# Altium PCB PCB_Mach_giao_tiep.PcbDoc (part 1 of 2)
Units mm, origin at the board's own origin, x right, y up, seen from the top; angles counter-clockwise.
Board outline 102.41 x 90.02 mm, 2 copper layers (Top Layer, Bottom Layer); 27 components, 181 nets, 442 pads, 75 vias.
Unrouted connection lines stored in the file: 4.
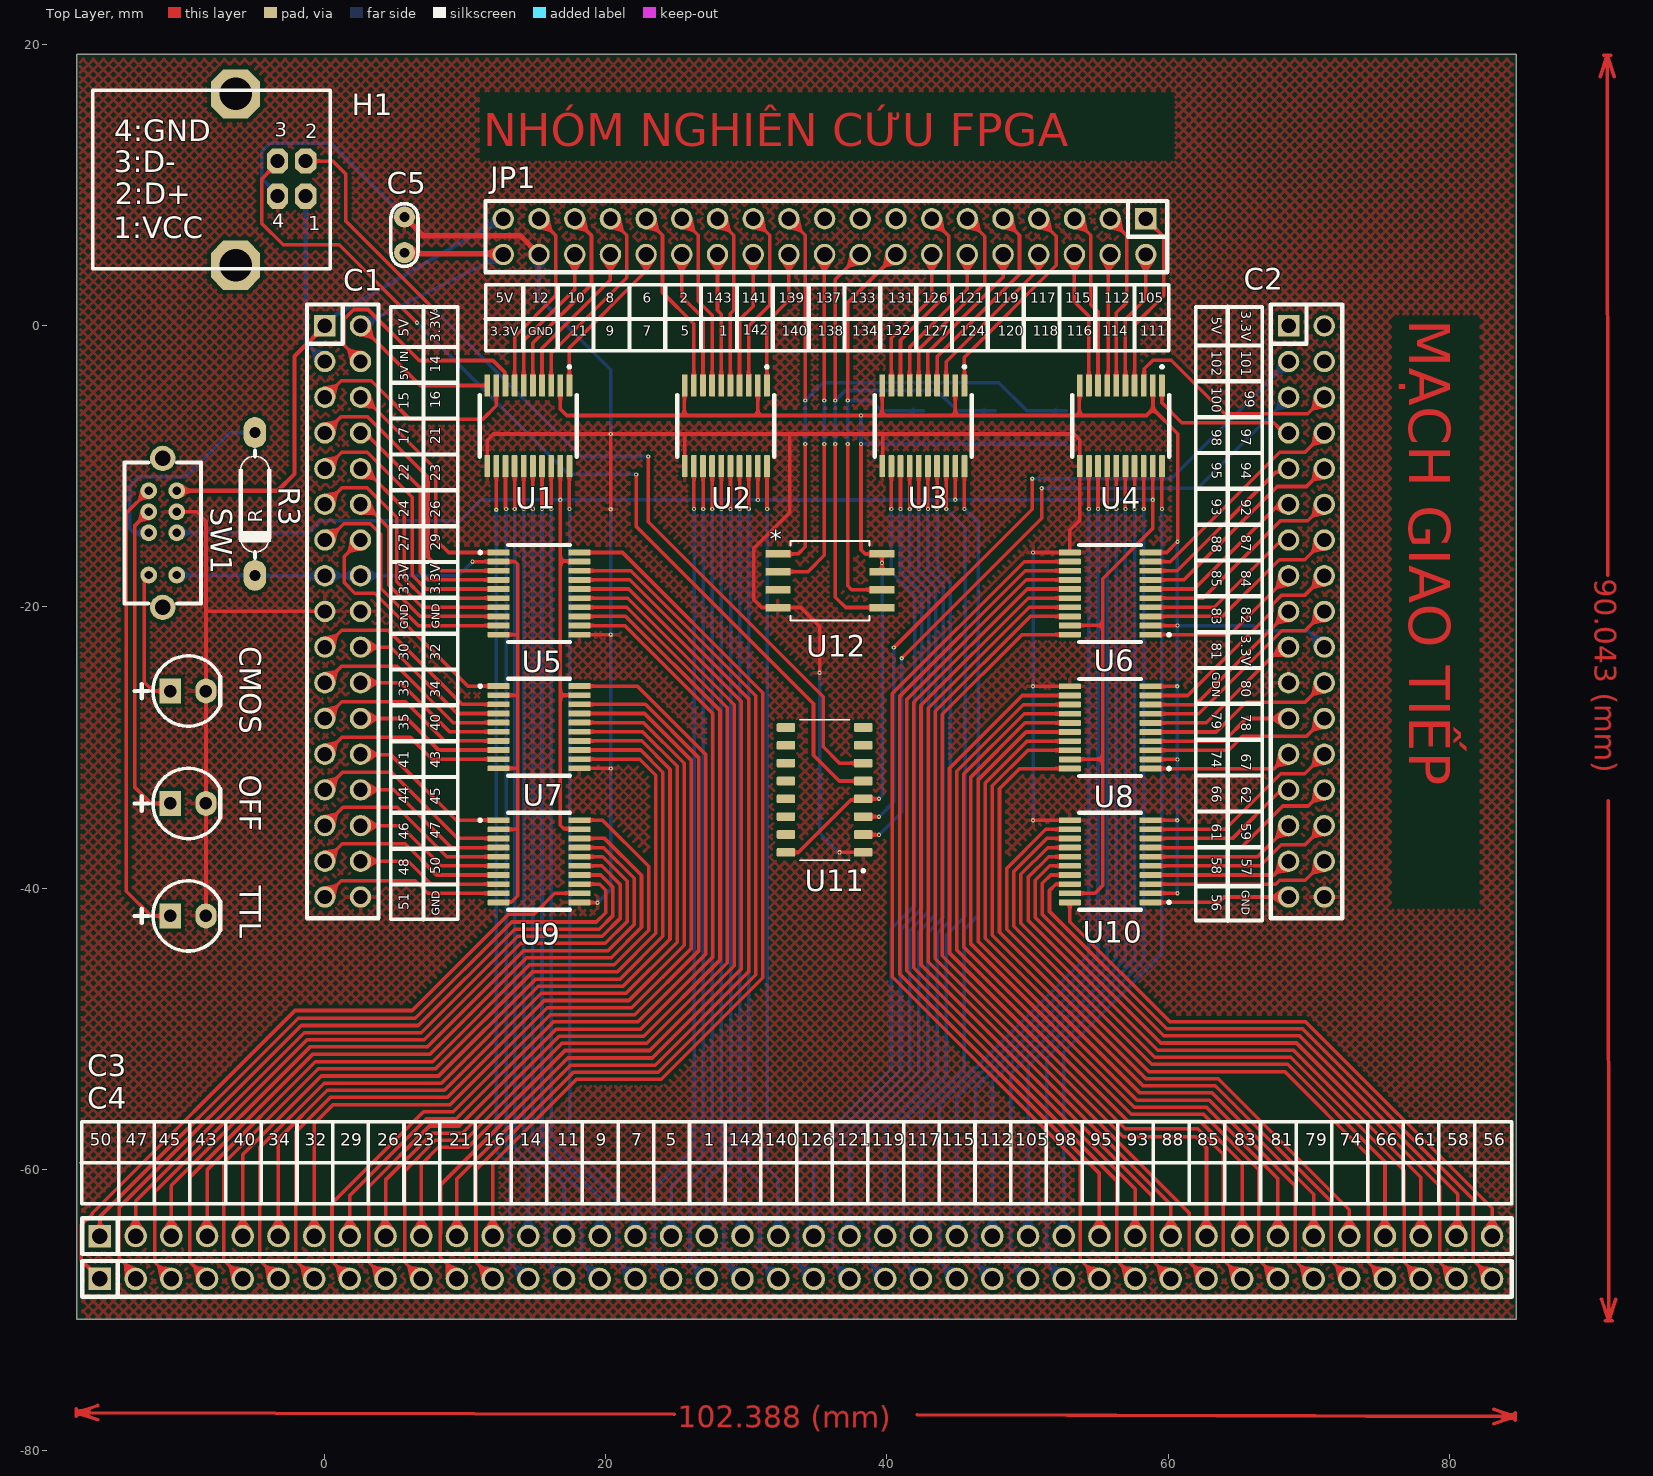
[diagram p0: Top Layer view]
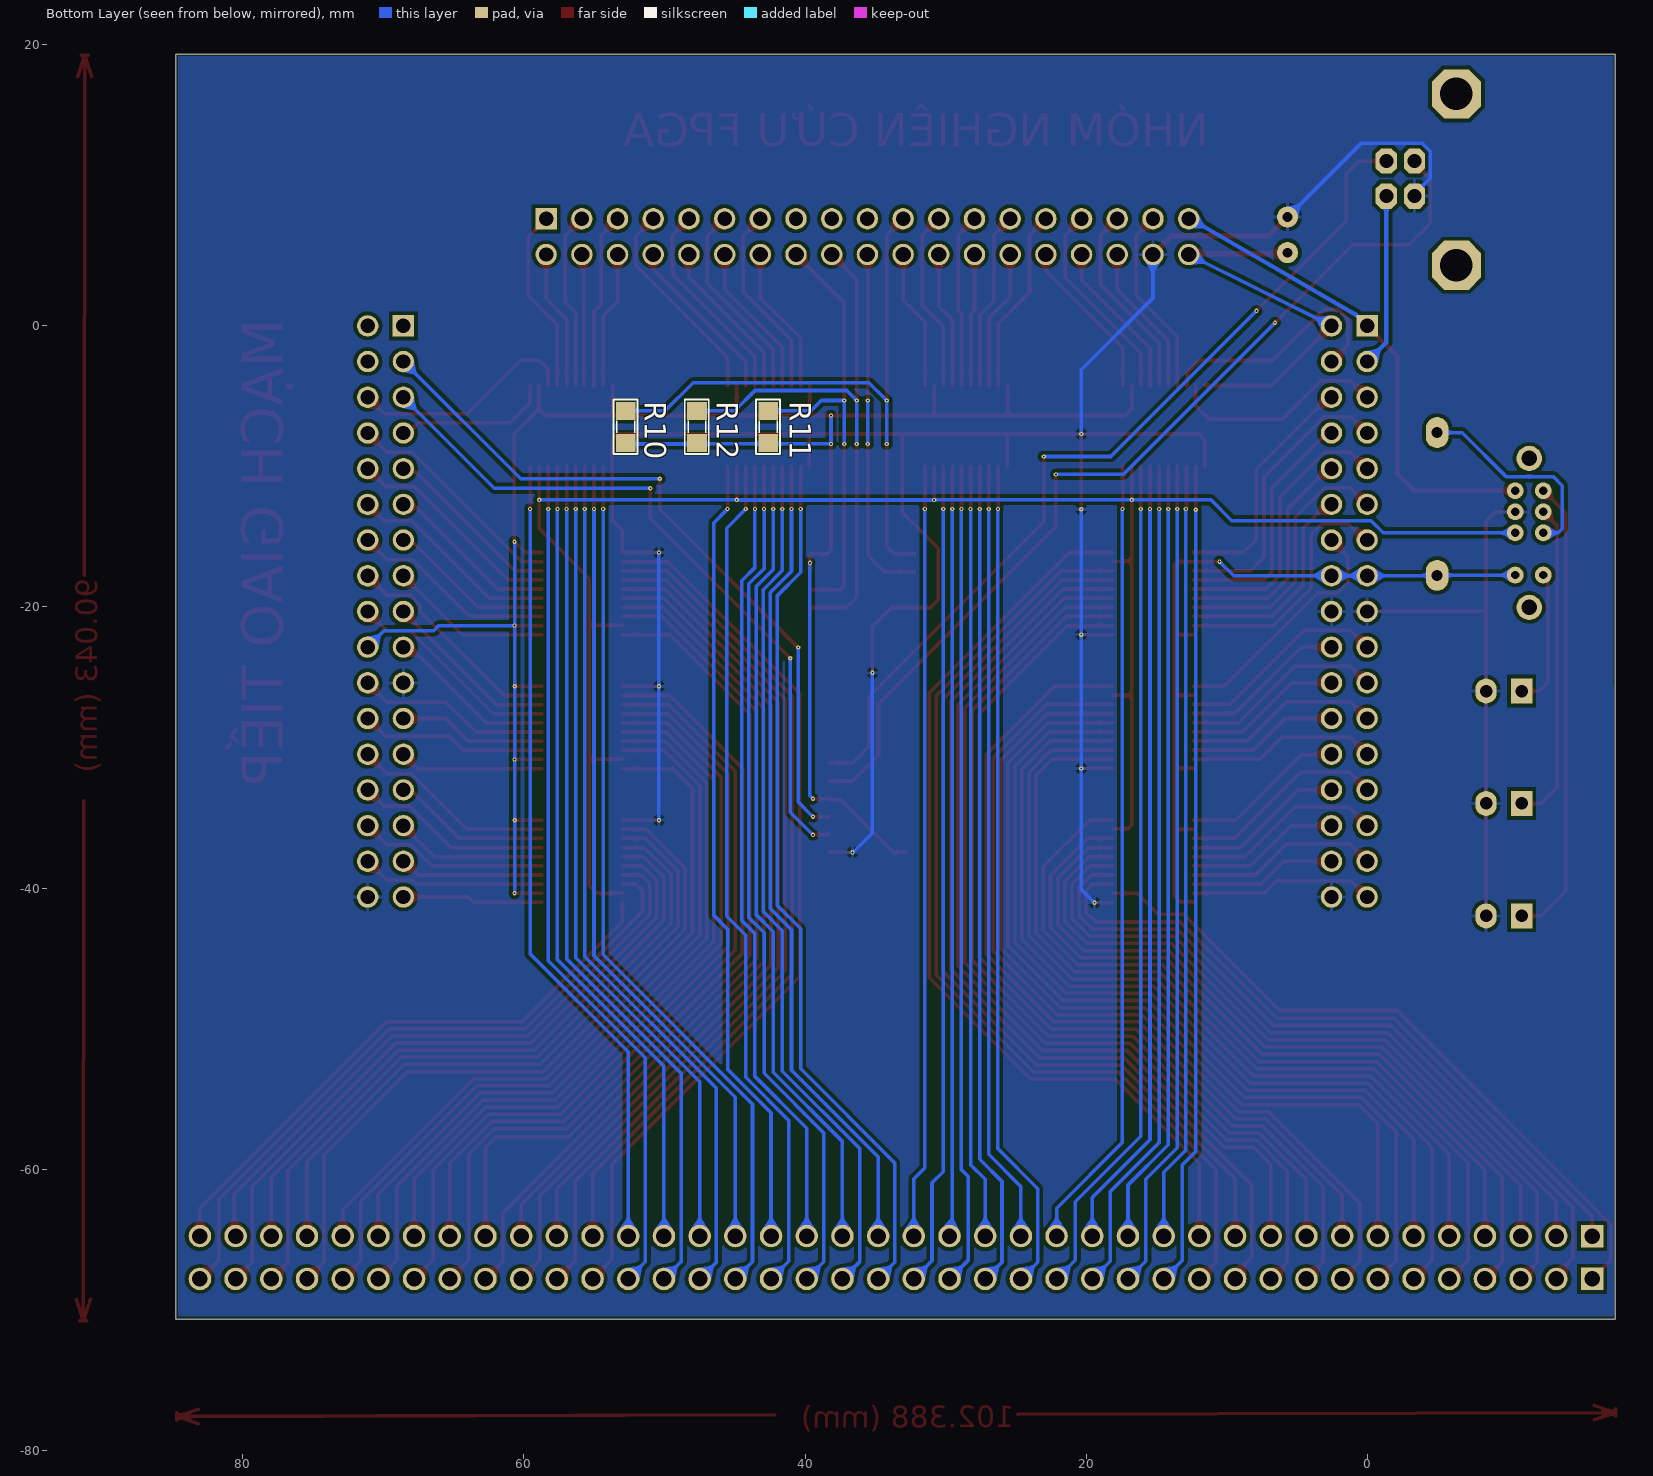
[diagram p1: Bottom Layer view, seen from below]
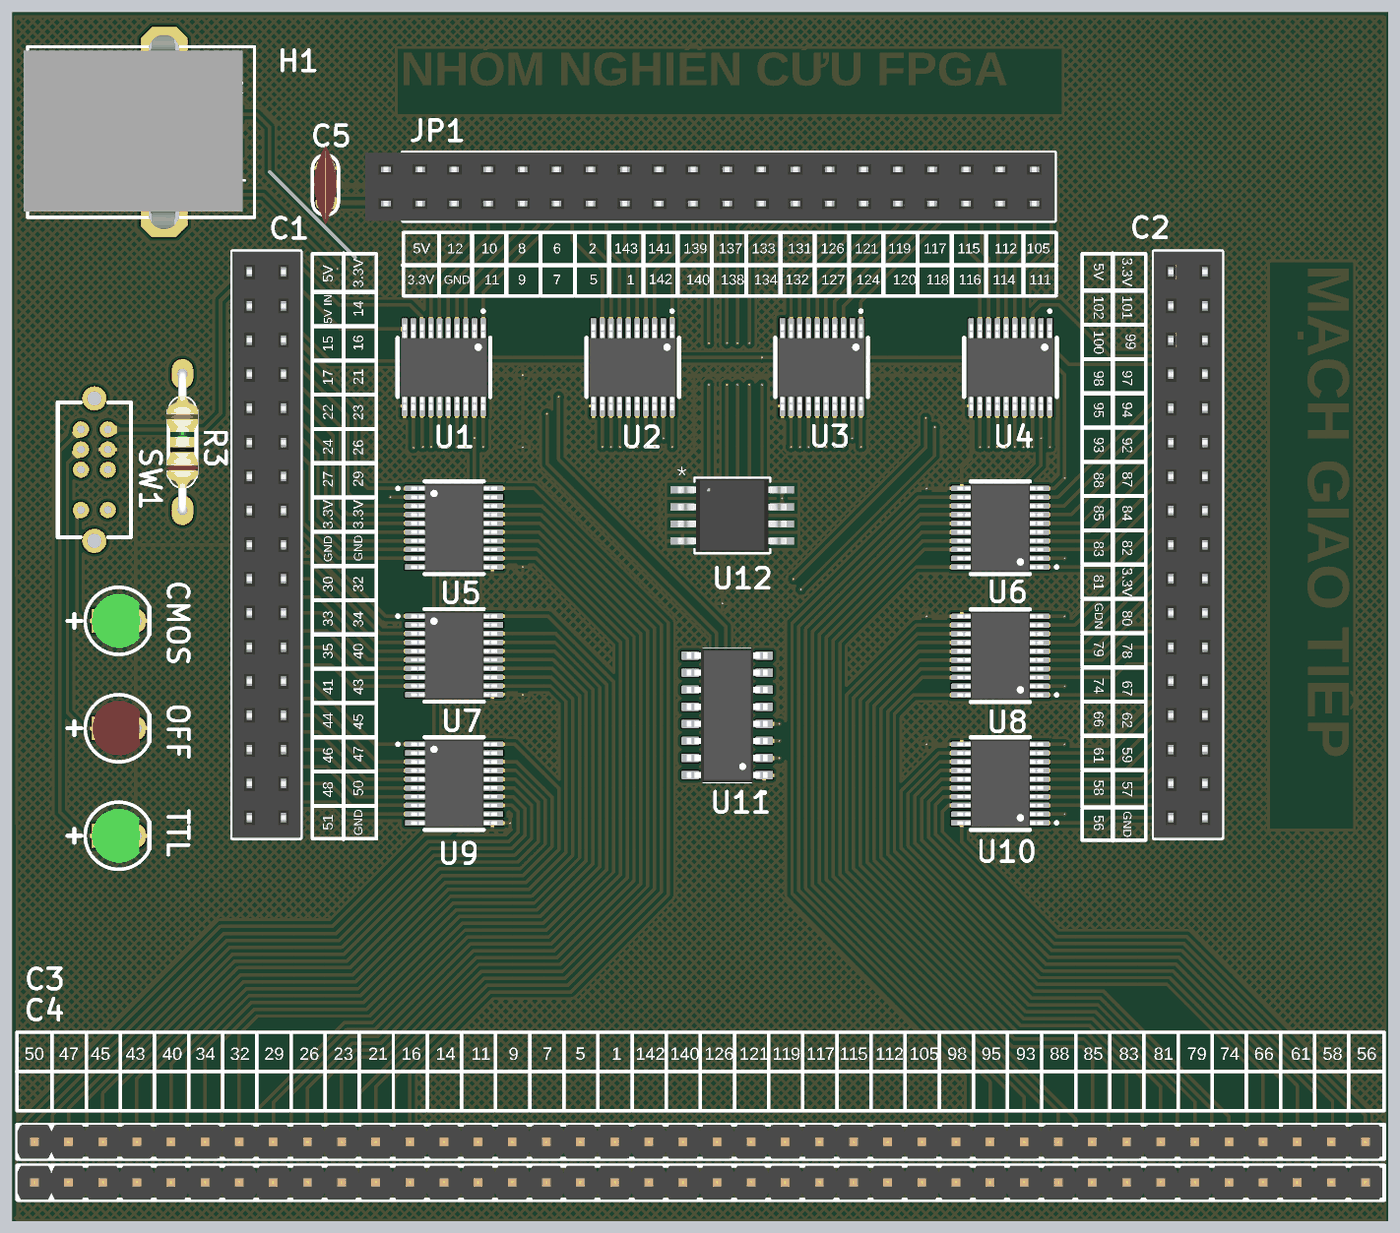
[diagram p3: 3D render of the assembled board from above, using the file's embedded part models]
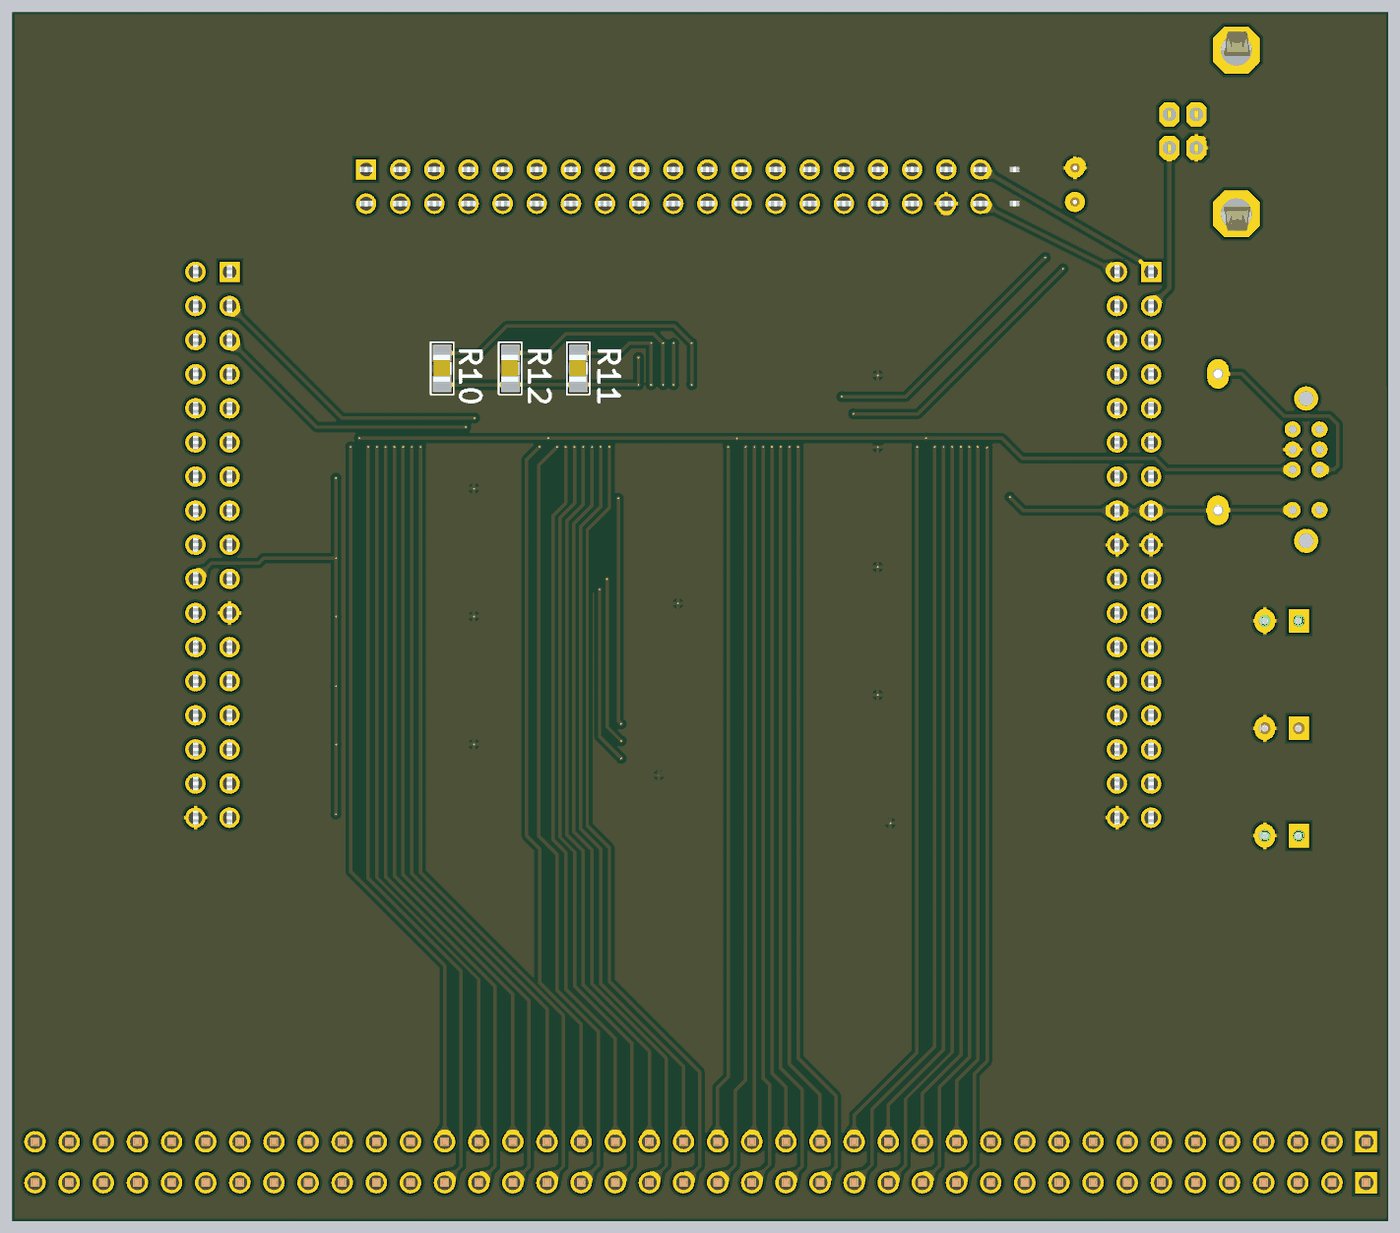
[diagram p4: 3D render of the assembled board from below, using the file's embedded part models]

## Layer stack, top to bottom
Top Solder: solder mask 0.0102, Solder Resist, Dk 3.5
Top Layer: signal copper 0.0356
Dielectric 1: dielectric 0.32, FR-4, Dk 4.8
Bottom Layer: signal copper 0.0356
Bottom Solder: solder mask 0.0102, Solder Resist, Dk 3.5

## Board outline
-17.653,-70.688 -17.653,19.329 84.76,19.329 84.76,-70.688

## Design rules (kind name [scope] priority, off if disabled: settings)
Clearance [All] p1: gap=0.254 ignorepadtopadclearanceinfootprint=TRUE
PolygonConnect [All] p1: connectstyle=Relief reliefconductorwidth=0.254 reliefentries=4 polygonreliefangle="90 Angle" airgapwidth=0.254
RoutingVias [All] p1: holewidth=0.127 width=0.305 viastyle="Through Hole" minholewidth=0.127 minwidth=0.305 maxholewidth=0.178 maxwidth=0.508
SilkToSilkClearance [IsText] p1: silktosilkclearance=0.254
SolderMaskExpansion [All] p1: expansion=0.102
Width [All] p1: maxlimit=0.508 minlimit=0.254 preferedwidth=0.381
29 further rules are at their usual default settings.

## Components (designator, comment, footprint, x,y, rotation, side; value= is the part's Value field where it differs from the comment)
C1 "JP17x2" JP17-C2T#1 1.27,-20.32 r270 top locked
C2 "JP17x2" JP17-C2T#2 69.85,-20.32 r270 top locked
C3 "JP40" JP40-D1T -16.002,-64.77 r0 top locked
C4 "JP40" JP40-D1T -16.002,-67.818 r0 top locked
C5 "104" "tu gom" 5.664,6.477 r90 top locked
CMOS "LED 3mm Xanh" "LED 3MM XANH" -9.728,-25.984 r0 top locked
H1 "USB" USB-B-STRANGE -1.362,9.227 r0 top locked
JP1 "JP 2x19 2.54" "JP 2X20 CT" 34.29,6.35 r180 top locked
OFF "LED 3mm Do" "LED 3mm Do" -9.728,-33.985 r0 top locked
R3 "100" "DIEN TRO 1/4 W" -4.978,-17.755 r90 top locked value="R1/4W - 1K"
R10 "10k" SM-0805 52.756,-7.188 r270 bottom locked value="R1/4W - 1K"
R11 "10k" SM-0805 42.621,-7.188 r270 bottom locked value="R1/4W - 1K"
R12 "10k" SM-0805 47.688,-7.188 r270 bottom locked value="R1/4W - 1K"
SW1 "SW-SSAC-1370753" SW-SSAC-1370753 -10.536,-17.729 r90 top locked
TTL "LED 3mm Xanh" "LED 3MM XANH" -9.728,-41.986 r0 top locked
U1 "TXS0108EPWR" SOP65P640X120-20N 14.478,-7.112 r270 top locked
U2 "TXS0108EPWR" SOP65P640X120-20N 28.533,-7.112 r270 top locked
U3 "TXS0108EPWR" SOP65P640X120-20N 42.587,-7.112 r270 top locked
U4 "TXS0108EPWR" SOP65P640X120-20N 56.642,-7.112 r270 top locked
U5 "TXS0108EPWR" SOP65P640X120-20N 15.24,-19.05 r0 top locked
U6 "TXS0108EPWR" SOP65P640X120-20N 55.88,-19.05 r180 top locked
U7 "TXS0108EPWR" SOP65P640X120-20N 15.24,-28.557 r0 top locked
U8 "TXS0108EPWR" SOP65P640X120-20N 55.88,-28.575 r180 top locked
U9 "TXS0108EPWR" SOP65P640X120-20N 15.24,-38.1 r0 top locked
U10 "TXS0108EPWR" SOP65P640X120-20N 55.88,-38.1 r180 top locked
U11 "CH340C" SOIC127P600X180-16N 35.56,-33.02 r180 top locked
U12 "W25Q16JVSNIQ" WIN_SS-8_WIN-M 35.941,-18.136 r0 top locked

## Footprints (in the part's own frame and the unit in brackets; to place one, negate y for a bottom-side part, rotate by r counter-clockwise, add the part's x,y. Pads: shape width x height; smd on the part's side, far side on the other; paste and mask are expansions set on the pad)
"DIEN TRO 1/4 W" [mm]
  oval 2.2x1.6 hole 0.787: 1(0,0) 2(10.16,0)
  silkscreen extent 1.26,-1.02 8.88,1.02, body extent -0.3,-1.16 10.46,1.16, height 2.93
JP17-C2T#1 [mm] "34 pins, dual row, straight, gold plating"
  rect 1.52x1.52 hole 1.02 mask+0.102: 1(-20.32,-1.27)
  round 1.52 hole 1.02: 2(-17.78,-1.27) 3(-15.24,-1.27) 4(-12.7,-1.27) 5(-10.16,-1.27) 6(-7.62,-1.27) 7(-5.08,-1.27) 8(-2.54,-1.27) 9(0,-1.27) 10(2.54,-1.27) 11(5.08,-1.27) 12(7.62,-1.27) 13(10.16,-1.27) 14(12.7,-1.27) 15(15.24,-1.27) 16(17.78,-1.27) 17(20.32,-1.27) 18(20.32,1.27) 19(17.78,1.27) 20(15.24,1.27) 21(12.7,1.27) 22(10.16,1.27) 23(7.62,1.27) 24(5.08,1.27) 25(2.54,1.27) 26(0,1.27) 27(-2.54,1.27) 28(-5.08,1.27) 29(-7.62,1.27) 30(-10.16,1.27) 31(-12.7,1.27) 32(-15.24,1.27) 33(-17.78,1.27) 34(-20.32,1.27)
  silkscreen extent -21.84,-2.54 21.84,2.54, body extent -21.84,-2.54 21.84,2.54, height 8.51
JP17-C2T#2 [mm] "34 pins, dual row, straight, gold plating"
  rect 1.52x1.52 hole 1.02: 1(-20.32,-1.27)
  round 1.52 hole 1.02: 2(-17.78,-1.27) 3(-15.24,-1.27) 4(-12.7,-1.27) 5(-10.16,-1.27) 6(-7.62,-1.27) 7(-5.08,-1.27) 8(-2.54,-1.27) 9(0,-1.27) 10(2.54,-1.27) 11(5.08,-1.27) 12(7.62,-1.27) 13(10.16,-1.27) 14(12.7,-1.27) 15(15.24,-1.27) 16(17.78,-1.27) 17(20.32,-1.27) 18(20.32,1.27) 19(17.78,1.27) 20(15.24,1.27) 21(12.7,1.27) 22(10.16,1.27) 23(7.62,1.27) 24(5.08,1.27) 25(2.54,1.27) 26(0,1.27) 27(-2.54,1.27) 28(-5.08,1.27) 29(-7.62,1.27) 30(-10.16,1.27) 31(-12.7,1.27) 32(-15.24,1.27) 33(-17.78,1.27) 34(-20.32,1.27)
  silkscreen extent -21.84,-2.54 21.84,2.54, body extent -21.84,-2.54 21.84,2.54, height 8.51
JP40-D1T [mm] "40 pins, 1 row, straight, gold plating"
  rect 1.6x1.6 hole 1.1: 1(0,0)
  round 1.6 hole 1.1: 2(2.54,0) 3(5.08,0) 4(7.62,0) 5(10.16,0) 6(12.7,0) 7(15.24,0) 8(17.78,0) 9(20.32,0) 10(22.86,0) 11(25.4,0) 12(27.94,0) 13(30.48,0) 14(33.02,0) 15(35.56,0) 16(38.1,0) 17(40.64,0) 18(43.18,0) 19(45.72,0) 20(48.26,0) 21(50.8,0) 22(53.34,0) 23(55.88,0) 24(58.42,0) 25(60.96,0) 26(63.5,0) 27(66.04,0) 28(68.58,0) 29(71.12,0) 30(73.66,0) 31(76.2,0) 32(78.74,0) 33(81.28,0) 34(83.82,0) 35(86.36,0) 36(88.9,0) 37(91.44,0) 38(93.98,0) 39(96.52,0) 40(99.06,0)
  silkscreen extent -1.27,-1.27 100.46,1.27, body extent -1.27,-1.27 100.33,1.27, height 8.54
"JP 2X20 CT" [mm] "40 pins, dual row, straight, gold plating"
  rect 1.52x1.52 hole 1.02: 1(-24.13,-1.27)
  round 1.52 hole 1.02: 2(-21.59,-1.27) 3(-19.05,-1.27) 4(-16.51,-1.27) 5(-13.97,-1.27) 6(-11.43,-1.27) 7(-8.89,-1.27) 8(-6.35,-1.27) 9(-3.81,-1.27) 10(-1.27,-1.27) 11(1.27,-1.27) 12(3.81,-1.27) 13(6.35,-1.27) 14(8.89,-1.27) 15(11.43,-1.27) 16(13.97,-1.27) 17(16.51,-1.27) 18(19.05,-1.27) 38(-24.13,1.27)
  round 1.52 hole 1.02 mask+0.102: 19(21.59,-1.27)
  round 1.524 hole 1.1: 20(21.59,1.27) 21(19.05,1.27) 22(16.51,1.27) 23(13.97,1.27) 24(11.43,1.27) 25(8.891,1.27) 26(6.351,1.27) 27(3.811,1.27) 28(1.271,1.27) 29(-1.269,1.27) 30(-3.809,1.27) 31(-6.349,1.27) 32(-8.889,1.27) 33(-11.429,1.27) 34(-13.968,1.27) 35(-16.508,1.27) 36(-19.048,1.27) 37(-21.588,1.27)
  silkscreen extent -25.65,-2.54 22.86,2.54, body extent -25.65,-2.54 25.65,2.54, height 8.51
"LED 3mm Do" [mil] "Footprintf LED phi 3"
  rect 60x70 hole 35: 1(-50,0)
  oval 60x70 hole 35: 2(50,0)
  silkscreen extent -150,-98 90,98, body extent -77,-78 60,78, height 205
"LED 3MM XANH" [mil]
  rect 60x70 hole 35: 1(-50,0)
  oval 60x70 hole 35: 2(50,0)
  silkscreen extent -150,-98 90,98, body extent -77,-78 60,78, height 205
SM-0805 [mil] "Compoment SMD 80x50mil"
  rect 50x55 smd: 1(-45,0) 2(45,0)
  silkscreen extent -77,-34 76,33, body extent -40,-27 40,23, height 24
SOIC127P600X180-16N [mm]
  rrect25% 1.31x0.62 smd: 1(-2.75,4.445) 2(-2.75,3.175) 3(-2.75,1.905) 4(-2.75,0.635) 5(-2.75,-0.635) 6(-2.75,-1.905) 7(-2.75,-3.175) 8(-2.75,-4.445) 9(2.75,-4.445) 10(2.75,-3.175) 11(2.75,-1.905) 12(2.75,-0.635) 13(2.75,0.635) 14(2.75,1.905) 15(2.75,3.175) 16(2.75,4.445)
  silkscreen extent -2.85,-5 1.78,5.85, body extent -3,-5 3,5, height 1.8
SOP65P640X120-20N [mm]
  rrect25% 1.57x0.41 smd: 1(-2.87,2.925) 2(-2.87,2.275) 3(-2.87,1.625) 4(-2.87,0.975) 5(-2.87,0.325) 6(-2.87,-0.325) 7(-2.87,-0.975) 8(-2.87,-1.625) 9(-2.87,-2.275) 10(-2.87,-2.925) 11(2.87,-2.925) 12(2.87,-2.275) 13(2.87,-1.625) 14(2.87,-0.975) 15(2.87,-0.325) 16(2.87,0.325) 17(2.87,0.975) 18(2.87,1.625) 19(2.87,2.275) 20(2.87,2.925)
  silkscreen extent -4.29,-3.45 2.2,3.45, body extent -3.2,-3.25 3.2,3.25, height 1.2
SW-SSAC-1370753 [mm]
  round 1.2 hole 0.6: 1(0,2) 2(3,2) 3(4.5,2) 4(6,2) 5(0,0) 6(3,0) 7(4.5,0)
  round 1.2 hole 0.6 mask+0.102: 8(6,0)
  round 1.8 hole 1.1: 9(-2.3,1) 10(8.3,1)
  silkscreen extent -2.03,-1.72 8,3.72
"tu gom" [mm] "Tu gom mini"
  round 1.5 hole 0.7: 1(-1.27,0) 2(1.27,0)
  silkscreen extent -2.25,-0.97 2.22,0.97, body extent -2.92,-0.85 2.92,0.85, height 6.12
USB-B-STRANGE [mm] "USB Type B - STRANGE - Slave Device"
  oct 1.5x1.8 hole 1: 1(0,0) 2(0,2.5) 3(-2,2.5) 4(-2,0)
  oct 3.5x3.5 hole 2.3: 5(-4.988,7.283) 6(-4.988,-4.909)
  silkscreen extent -15.15,-5.16 1.74,7.54, body extent -15.45,-6.18 0.85,8.68, height 10.98
WIN_SS-8_WIN-M [mm]
  rect 1.787x0.533 smd paste+0 mask+0: 1(-3.708,1.905) 2(-3.708,0.635) 3(-3.708,-0.635) 4(-3.708,-1.905) 5(3.708,-1.905) 6(3.708,-0.635) 7(3.708,0.635) 8(3.708,1.905)
  silkscreen extent -2.82,-2.82 2.82,2.82, body extent -4.05,-2.69 4.05,2.69, height 2.16

## Part data
C1 C2: "WR-PHD 2.54 mm Dual Socket Header", Manufacturer="Würth Elektronik eiSos GmbH", partNo=61303421821, ComponentLink1 Description=Manufacturer, ComponentLink1URL=http://www.we-online.com, ComponentLink2 Description=Datasheet, ComponentLink2URL=http://katalog.we-online.de/em/datasheet/6130xx21821.pdf, Created by="Karrer Zheng", Created Date="29 March 2013", NoPins=34
C3 C4: "WR-PHD 2.54 mm Angled Socket Header", Manufacturer="Würth Elektronik eiSos GmbH", partNo=613040143121, ComponentLink1 Description=Manufacturer, ComponentLink1URL=http://www.we-online.com, ComponentLink2 Description=Datasheet, ComponentLink2URL=http://katalog.we-online.de/em/datasheet/6130xx143121.pdf, Created by="Karrer Zheng", Created Date="29 March 2013", NoPins=40
C5: library part "Tu gom 104 50V", "C?m", Chung_Loai=C?m, Don_Vi=Con, Ma_Hang=MH004761, So_Chan=2, Ten_Linh_Kien="T? g?m 104 100nF 50V"
CMOS OFF TTL: "C?m", Chung_Loai=C?m, Don_Vi=Con
  CMOS TTL: Ma_Hang=MH004935, Ten_Linh_Kien="LED 3MM Xanh Lá ( SS)"
  OFF: Ma_Hang=MH004931, Ten_Linh_Kien="LED 3MM Sáng Ð? ( SS)"
H1: "USB conector"
JP1: library part "JP 2x19 2.54 Cai Thang", "C?m", Chung_Loai=C?m, Don_Vi=Con, Ma_Hang=MH008647, Ten_Linh_Kien="Jump 恤i C醝 2.54MM 2x20P Th?ng"
R3 R10 R11 R12: library part Res, "Resistor 1/4W"
U1 U2 U3 U4 U5 U6 U7 U8 U9 U10: Package=None, Availability=Unavailable, MP=TXS0108EPWR, Price=None
U11: "USB to serial chip CH340", Package=None, Availability=Unavailable, MF="{'manufacturer': u'WCH'}", MP=CH340C, Price=None
U12: "No Description Available", Mfr_Name=Winbond, Copyright="Copyright (C) 2022 Ultra Librarian. All rights reserved.", Manufacturer_Part_Number=W25Q16JVSNIQ, RefDes=RefDes, Type=DEV

## Via types
v1: diameter 0.305, hole 0.127, Top Layer to Bottom Layer, tented both sides, 75 vias

## Nets (pads, with @x,y where several pads share a name; then routed paths per layer and width w, separated by ;. In a path a pad name is that pad's centre, name@x,y a point inside that pad or via, vN(x,y) a via of type N, cw(c..) or ccw(c..) an arc to the next point about the centre after c; other vN are vias at no path point)
3.3V: C1.8 C1.27 C1.34 C2.25 C2.34 C5.1 JP1.20 R3.1 R10.2 R11.2 R12.2 SW1.5 U1.2 U1.10 U2.2 U2.10 U3.2 U3.10 U4.2 U4.10 U5.2 U5.10 U6.2 U6.10 U7.2 U7.10 U8.2 U8.10 U9.2 U9.10 U10.2 U10.10 U11.4 U11.16 U12.7 U12.8 | length 251.6
  Top Layer w0.254: C1.34@2.54,0 6.782,-4.242 U1.10@11.553,-4.242 ; v1(10.506,-16.775) U5.2@12.37,-16.775 13.548,-16.775 13.727,-16.954 13.727,-21.946 ; U9.10@12.37,-41.025 12.409,-40.986 13.293,-40.986 13.727,-40.553 13.727,-35.687 ; U9.2@12.37,-35.825 13.589,-35.825 13.727,-35.687 ; U7.10@12.37,-31.482 13.614,-31.482 13.727,-31.369 ; U7.2@12.37,-26.282 13.683,-26.282 13.727,-26.238 ; U5.10@12.37,-21.975 13.698,-21.975 13.727,-21.946 ; U1.2@16.753,-4.242 16.753,-5.917 17.211,-6.375 25.578,-6.375 ; U2.10@25.608,-4.242 25.578,-4.272 25.578,-6.375 ; U2.2@30.808,-4.242 30.81,-4.245 30.81,-6.375 ; U11.16@32.81,-37.465 33.699,-37.465 37.434,-33.73 38.235,-33.73 U11.4@38.31,-33.655 v1(39.439,-33.655) ; v1(38.151,-8.407) 38.151,-15.926 38.456,-16.231 U12.8@39.649,-16.231 U12.7@39.649,-17.501 ; U3.10@39.662,-4.242 39.649,-4.255 39.649,-6.375 ; U3.2@44.862,-4.242 44.856,-4.248 44.856,-6.375 ; U4.10@53.717,-4.242 53.696,-4.263 53.696,-6.375 ; U10.2@58.75,-40.375 60.663,-40.375 v1(60.666,-40.372) ; U10.10@58.75,-35.175 v1(60.651,-35.175) ; U8.2@58.75,-30.85 v1(60.67,-30.85) ; U8.10@58.75,-25.65 v1(60.659,-25.65) ; U6.2@58.75,-21.325 v1(60.666,-21.325) ; U6.10@58.75,-16.125 59.897,-16.125 v1(60.666,-15.356) 60.681,-15.342 60.681,-7.671 58.928,-5.918 ; U4.2@58.917,-4.242 58.928,-4.253 58.928,-5.918 ; 13.727,-35.687 13.727,-31.369 ; 13.727,-31.369 13.727,-26.238 ; 13.727,-26.238 13.727,-21.946 ; 25.578,-6.375 30.81,-6.375 ; 30.81,-6.375 v1(38.151,-6.375) 39.649,-6.375 ; 39.649,-6.375 44.856,-6.375 ; 44.856,-6.375 53.696,-6.375 ; 53.696,-6.375 58.471,-6.375 58.928,-5.918
  Top Layer w0.381: C5.1@5.664,5.207 5.728,5.143 12.637,5.143 JP1.20@12.7,5.08
  Bottom Layer w0.254: SW1.5@-10.536,-17.729 -10.523,-17.742 -4.991,-17.742 R3.1@-4.978,-17.755 -4.966,-17.767 -0.013,-17.767 C1.8@0,-17.78 C1.27@2.54,-17.78 9.501,-17.78 v1(10.506,-16.775) ; C1.34@2.54,0 JP1.20@12.7,5.08 ; v1(38.151,-6.375) v1(38.151,-8.407) 38.158,-8.4 42.552,-8.4 R11.2@42.621,-8.331 42.69,-8.4 47.62,-8.4 R12.2@47.688,-8.331 47.765,-8.407 52.68,-8.407 R10.2@52.756,-8.331 ; v1(39.439,-33.655) 39.439,-33.641 39.649,-33.432 v1(39.649,-16.866) ; v1(60.666,-40.372) 60.655,-40.361 60.655,-30.864 v1(60.67,-30.85) ; v1@60.666,-30.85 v1(60.666,-21.325) ; v1(60.666,-15.356) v1(60.666,-21.325) ; C2.25@71.08,-22.707 70.967,-22.707 69.954,-21.694 66.423,-21.694 66.054,-21.325 v1(60.666,-21.325)
5V: C1.1 C2.1 JP1.19 SW1.8 | length 35.2
  Top Layer w0.305: SW1.8@-10.536,-11.729 -3.347,-11.729 -2.159,-10.541 -2.159,-2.159 C1.1@0,0
  Bottom Layer w0.305: C1.1@0,0 0.782,0.782 12.582,7.625 12.682,7.625 JP1.19@12.7,7.62
"5V IN": C1.2 H1.1 | length 12.3
  Bottom Layer w0.305: H1.1@-1.362,9.227 -1.362,-1.178 C1.2@0,-2.54
/CS: JP1.11 R10.1 U12.1 | length 45.9
  Top Layer w0.254: U12.1@32.233,-16.231 33.668,-16.231 34.188,-15.71 v1(34.188,-8.407) ; JP1.11@33.02,7.62 34.188,6.452 v1(34.188,-5.309)
  Bottom Layer w0.254: v1(34.188,-8.407) v1(34.188,-5.309) 35.458,-4.039 47.955,-4.039 49.962,-6.045 R10.1@52.756,-6.045
A1: JP1.26 U2.6 | length 9.4
  Top Layer w0.254: JP1.26@27.939,5.08 27.94,1.103 28.208,0.835 U2.6@28.208,-4.242
A2: JP1.14 U2.7 | length 12.8
  Top Layer w0.254: JP1.14@25.4,7.62 26.568,6.452 26.568,3.942 26.566,3.94 26.566,1.758 27.558,0.767 U2.7@27.558,-4.242
A5: JP1.25 U2.8 | length 9.9
  Top Layer w0.254: JP1.25@25.399,5.08 25.4,2.083 26.908,0.575 U2.8@26.908,-4.242
A6: JP1.15 U2.9 | length 13.3
  Top Layer w0.254: JP1.15@22.86,7.62 24.028,6.452 24.028,4.252 24.026,4.25 24.026,2.378 26.258,0.147 U2.9@26.258,-4.242
A7: JP1.24 U1.1 | length 11.6
  Top Layer w0.254: U1.1@17.403,-4.242 17.403,-1.545 22.86,3.912 JP1.24@22.86,5.08
A8: JP1.16 U1.3 | length 14.6
  Top Layer w0.254: U1.3@16.103,-4.242 16.103,-1.957 21.488,3.428 21.488,6.452 JP1.16@20.32,7.62
A9: JP1.23 U1.4 | length 11.3
  Top Layer w0.254: U1.4@15.453,-4.242 15.453,-1.59 20.32,3.277 JP1.23@20.32,5.08
A10: JP1.17 U1.5 | length 14.1
  Top Layer w0.254: U1.5@14.803,-4.242 14.803,-1.224 18.974,2.946 18.974,6.426 JP1.17@17.78,7.62
A11: JP1.22 U1.6 | length 10.8
  Top Layer w0.254: U1.6@14.153,-4.242 14.153,-1.038 17.78,2.589 JP1.22@17.78,5.08
A12: JP1.18 U1.7 | length 13.6
  Top Layer w0.254: U1.7@13.503,-4.242 13.503,-0.772 16.434,2.159 16.434,6.426 JP1.18@15.24,7.62
A14: C1.33 U1.8 | length 18
  Top Layer w0.254: C1.33@2.54,-2.54 1.374,-1.374 1.374,0.483 2.057,1.166 3.075,1.166 6.706,-2.464 11.96,-2.464 12.814,-3.319 12.814,-4.203 U1.8@12.853,-4.242
A15: C1.3 U1.9 | length 15.6
  Top Layer w0.254: C1.3@0,-5.08 1.166,-3.914 3.304,-3.914 6.02,-6.629 11.252,-6.629 12.194,-5.687 12.194,-4.251 U1.9@12.203,-4.242
A16: C1.32 U5.1 | length 17.3
  Top Layer w0.254: C1.32@2.54,-5.08 2.769,-5.08 7.899,-10.211 7.899,-15.215 8.81,-16.125 U5.1@12.37,-16.125
A17: C1.4 U5.3 | length 20.7
  Top Layer w0.254: C1.4@0,-7.62 1.166,-6.454 3.023,-6.454 7.341,-10.771 7.341,-16.475 8.291,-17.425 U5.3@12.37,-17.425
A21: C1.31 U5.4 | length 17.7
  Top Layer w0.254: C1.31@2.54,-7.62 2.869,-7.62 3.26,-8.011 3.261,-8.011 6.782,-11.532 6.782,-17.515 7.341,-18.075 U5.4@12.37,-18.075
A22: C1.5 U5.5 | length 20.1
  Top Layer w0.254: C1.5@0,-10.16 0.025,-10.16 1.192,-8.994 3.023,-8.994 6.223,-12.193 6.223,-17.747 7.201,-18.725 U5.5@12.37,-18.725
A23: C1.30 U5.6 | length 16.5
  Top Layer w0.254: C1.30@2.54,-10.16 2.794,-10.16 5.664,-13.03 5.664,-17.978 7.061,-19.375 U5.6@12.37,-19.375
A24: C1.6 U5.7 | length 19.1
  Top Layer w0.254: C1.6@0,-12.7 0.025,-12.7 1.192,-11.534 3.023,-11.534 5.105,-13.616 5.105,-18.21 6.921,-20.025 U5.7@12.37,-20.025
A26: C1.29 U5.8 | length 15.5
  Top Layer w0.254: C1.29@2.54,-12.7 2.869,-12.7 4.547,-14.378 4.547,-18.441 6.78,-20.675 U5.8@12.37,-20.675
A27: C1.7 U5.9 | length 18.1
  Top Layer w0.254: C1.7@0,-15.24 0.178,-15.24 1.344,-14.074 3.228,-14.074 3.988,-14.834 3.988,-18.673 6.64,-21.325 U5.9@12.37,-21.325
A29: C1.28 U7.1 | length 17.6
  Top Layer w0.254: C1.28@2.54,-15.24 1.374,-16.406 1.374,-18.263 2.135,-19.025 3.55,-19.025 10.157,-25.632 U7.1@12.37,-25.632
A30: C1.10 U7.3 | length 15
  Top Layer w0.254: C1.10@0,-22.86 1.194,-21.666 4.493,-21.666 9.759,-26.932 U7.3@12.37,-26.932
A32: C1.25 U7.4 | length 11.8
  Top Layer w0.254: C1.25@2.54,-22.86 4.699,-22.86 9.421,-27.582 U7.4@12.37,-27.582
A33: C1.11 U7.5 | length 14.5
  Top Layer w0.254: C1.11@0,-25.4 1.194,-24.206 5.113,-24.206 9.139,-28.232 U7.5@12.37,-28.232
A34: C1.24 U7.6 | length 11.3
  Top Layer w0.254: C1.24@2.54,-25.4 5.385,-25.4 8.867,-28.882 U7.6@12.37,-28.882
A35: C1.12 U7.7 | length 14
  Top Layer w0.254: C1.12@0,-27.94 1.194,-26.746 5.733,-26.746 8.519,-29.532 U7.7@12.37,-29.532
A40: C1.23 U7.8 | length 10.8
  Top Layer w0.254: C1.23@2.54,-27.94 5.842,-27.94 8.084,-30.182 U7.8@12.37,-30.182
A41: C1.13 U7.9 | length 13.5
  Top Layer w0.254: C1.13@0,-30.48 1.194,-29.286 6.091,-29.286 7.636,-30.832 U7.9@12.37,-30.832
A43: C1.22 U9.1 | length 11.8
  Top Layer w0.254: C1.22@2.54,-30.48 2.565,-30.505 4.674,-30.505 9.343,-35.175 U9.1@12.37,-35.175
A44: C1.14 U9.3 | length 14.9
  Top Layer w0.254: C1.14@0,-33.02 1.27,-31.75 4.725,-31.75 9.45,-36.475 U9.3@12.37,-36.475
A45: C1.21 U9.4 | length 11.5
  Top Layer w0.254: C1.21@2.54,-33.02 4.902,-33.02 9.007,-37.125 U9.4@12.37,-37.125
A46: C1.15 U9.5 | length 14.4
  Top Layer w0.254: C1.15@0,-35.56 1.295,-34.265 5.156,-34.265 5.893,-35.001 5.896,-35.001 8.669,-37.775 U9.5@12.37,-37.775
A47: C1.20 U9.6 | length 11
  Top Layer w0.254: C1.20@2.54,-35.56 5.41,-35.56 8.275,-38.425 U9.6@12.37,-38.425
A48: C1.16 U9.7 | length 13.8
  Top Layer w0.254: C1.16@0,-38.1 1.245,-36.855 5.728,-36.855 7.948,-39.075 U9.7@12.37,-39.075
A50: C1.19 U9.8 | length 10.5
  Top Layer w0.254: C1.19@2.54,-38.1 5.944,-38.1 7.569,-39.726 U9.8@12.37,-39.725
A51: C1.17 U9.9 | length 13.2
  Top Layer w0.254: C1.17@0,-40.64 1.166,-39.474 6.426,-39.474 7.328,-40.375 U9.9@12.37,-40.375
A56: C2.17 U10.1 | length 10
  Top Layer w0.254: U10.1@58.75,-41.025 63.598,-41.025 63.983,-40.64 C2.17@68.58,-40.64
A57: C2.19 U10.3 | length 13
  Top Layer w0.254: U10.3@58.75,-39.725 67.673,-39.725 67.94,-39.459 69.761,-39.459 C2.19@71.12,-38.1
A58: C2.16 U10.4 | length 10.2
  Top Layer w0.254: U10.4@58.75,-39.075 67.533,-39.075 68.508,-38.1 C2.16@68.58,-38.1
A59: C2.20 U10.5 | length 13.6
  Top Layer w0.254: U10.5@58.75,-38.425 66.553,-38.425 68.047,-36.932 69.748,-36.932 C2.20@71.12,-35.56
A61: C2.15 U10.6 | length 10.7
  Top Layer w0.254: U10.6@58.75,-37.775 66.365,-37.775 C2.15@68.58,-35.56
A62: C2.21 U10.7 | length 14.1
  Top Layer w0.254: U10.7@58.75,-37.125 65.193,-37.125 68.151,-34.167 69.973,-34.167 C2.21@71.12,-33.02
A66: C2.14 U10.8 | length 11.3
  Top Layer w0.254: U10.8@58.75,-36.475 64.592,-36.475 67.814,-33.253 68.347,-33.253 C2.14@68.58,-33.02
A67: C2.22 U10.9 | length 14.6
  Top Layer w0.254: U10.9@58.75,-35.825 64.073,-35.825 68.021,-31.877 69.723,-31.877 C2.22@71.12,-30.48
A74: C2.13 U8.1 | length 10.3
  Top Layer w0.254: U8.1@58.75,-31.5 67.56,-31.5 C2.13@68.58,-30.48
A78: C2.23 U8.3 | length 13.3
  Top Layer w0.254: U8.3@58.75,-30.2 64.313,-30.2 65.303,-29.21 69.85,-29.21 C2.23@71.12,-27.94
A79: C2.12 U8.4 | length 10.5
  Top Layer w0.254: U8.4@58.75,-29.55 63.973,-29.55 65.583,-27.94 C2.12@68.58,-27.94
A80: C2.24 U8.5 | length 13.8
  Top Layer w0.254: U8.5@58.75,-28.9 63.429,-28.9 65.555,-26.774 69.746,-26.774 C2.24@71.12,-25.4
A81: C2.10 U8.6 | length 12.1
  Top Layer w0.254: U8.6@58.75,-28.25 62.707,-28.25 67.865,-23.093 68.347,-23.093 C2.10@68.58,-22.86
A82: C2.26 U8.7 | length 15.4
  Top Layer w0.254: U8.7@58.75,-27.6 62.19,-27.6 68.099,-21.692 69.748,-21.692 C2.26@71.12,-20.32
A83: C2.9 U8.8 | length 12.6
  Top Layer w0.254: U8.8@58.75,-26.95 61.95,-26.95 C2.9@68.58,-20.32
A84: C2.27 U8.9 | length 16.2
  Top Layer w0.254: U8.9@58.75,-26.3 61.406,-26.3 67.403,-20.303 67.405,-20.291 67.414,-20.234 67.414,-19.837 68.097,-19.154 69.746,-19.154 C2.27@71.12,-17.78
A85: C2.8 U6.1 | length 11.6
  Top Layer w0.254: U6.1@58.75,-21.975 64.385,-21.975 C2.8@68.58,-17.78
A87: C2.28 U6.3 | length 14.6
  Top Layer w0.254: U6.3@58.75,-20.675 63.863,-20.675 67.905,-16.633 69.727,-16.633 C2.28@71.12,-15.24
A88: C2.7 U6.4 | length 11.8
  Top Layer w0.254: U6.4@58.75,-20.025 63.287,-20.025 67.839,-15.473 68.347,-15.473 C2.7@68.58,-15.24
A92: C2.29 U6.5 | length 15.1
  Top Layer w0.254: U6.5@58.75,-19.375 62.489,-19.375 67.996,-13.868 69.952,-13.868 C2.29@71.12,-12.7
A93: C2.6 U6.6 | length 12.3
  Top Layer w0.254: U6.6@58.75,-18.725 61.869,-18.725 67.681,-12.913 68.367,-12.913 C2.6@68.58,-12.7
A94: C2.30 U6.7 | length 15.6
  Top Layer w0.254: U6.7@58.75,-18.075 61.135,-18.075 67.78,-11.43 69.85,-11.43 C2.30@71.12,-10.16
A95: C2.5 U6.8 | length 12.8
  Top Layer w0.254: U6.8@58.75,-17.425 60.655,-17.425 67.677,-10.402 67.794,-10.402 67.804,-10.393 68.347,-10.393 C2.5@68.58,-10.16
A97: C2.31 U6.9 | length 16.2
  Top Layer w0.254: U6.9@58.75,-16.775 60.162,-16.775 67.943,-8.994 69.746,-8.994 C2.31@71.12,-7.62
A98: C2.4 U4.1 | length 11.1
  Top Layer w0.254: U4.1@59.567,-4.242 59.567,-5.465 60.985,-6.883 67.513,-6.883 67.859,-7.229 67.86,-7.229 68.251,-7.62 C2.4@68.58,-7.62
A99: C2.32 U4.3 | length 16.3
  Top Layer w0.254: U4.3@58.267,-4.242 58.306,-4.203 58.306,-3.061 58.928,-2.438 60.223,-2.438 64.033,-6.248 69.952,-6.248 C2.32@71.12,-5.08
A100: C2.3 U11.2 | length 50.9
  Top Layer w0.254: U11.2@38.31,-36.195 38.335,-36.22 38.345,-36.211 39.43,-36.211 v1(39.439,-36.22) ; v1(41.046,-23.647) 51.003,-13.69 v1(51.003,-11.557)
  Bottom Layer w0.254: v1(39.439,-36.22) 41.046,-34.613 v1(41.046,-23.647) ; v1(51.003,-11.557) 62.103,-11.557 C2.3@68.58,-5.08
A101: C2.33
A102: C2.2 U11.3 | length 51.4
  Top Layer w0.254: U11.3@38.31,-34.925 v1(39.439,-34.925) v1@39.465,-34.925 ; v1(40.488,-22.885) 40.501,-22.885 40.605,-22.782 40.61,-22.782 50.343,-13.049 v1(50.343,-10.885)
  Bottom Layer w0.254: v1(39.439,-34.925) 40.488,-33.877 v1(40.488,-22.885) ; v1(50.343,-10.885) 60.235,-10.885 C2.2@68.58,-2.54
A105: JP1.1 U4.4 | length 13.2
  Top Layer w0.254: U4.4@57.617,-4.242 57.617,0.061 59.69,2.134 59.69,6.35 JP1.1@58.42,7.62
A111: JP1.38 U4.5 | length 9.9
  Top Layer w0.254: U4.5@56.967,-4.242 56.967,0.477 58.42,1.93 JP1.38@58.42,5.08
A112: JP1.2 U4.6 | length 12.6
  Top Layer w0.254: JP1.2@55.878,7.62 JP1.2@55.88,7.62 57.047,6.453 57.047,1.652 56.317,0.923 U4.6@56.317,-4.242
A114: JP1.37 U4.7 | length 9.4
  Top Layer w0.254: U4.7@55.667,-4.242 55.731,-4.178 55.731,4.931 JP1.37@55.88,5.08
A115: JP1.3 U4.8 | length 12.6
  Top Layer w0.254: JP1.3@53.338,7.62 JP1.3@53.34,7.62 54.507,6.453 54.507,3.821 ; 54.506,3.821 54.506,1.517 55.017,1.007 U4.8@55.017,-4.242
A116: JP1.36 U4.9 | length 9.7
  Top Layer w0.254: JP1.36@53.34,5.08 53.34,1.727 54.367,0.7 U4.9@54.367,-4.242
A117: JP1.4 U3.1 | length 15.1
  Top Layer w0.254: U3.1@45.512,-4.242 45.512,-2.23 52.045,4.302 52.045,6.374 JP1.4@50.798,7.62
A118: JP1.35 U3.3 | length 12.1
  Top Layer w0.254: U3.3@44.212,-4.242 44.212,-2.549 50.8,4.039 JP1.35@50.8,5.08
A119: JP1.5 U3.4 | length 14.8
  Top Layer w0.254: U3.4@43.562,-4.242 43.562,-2.198 49.428,3.669 49.428,6.45 JP1.5@48.258,7.62
A120: JP1.34 U3.5 | length 11.5
  Top Layer w0.254: U3.5@42.912,-4.242 42.912,-1.893 48.26,3.454 JP1.34@48.26,5.08
A121: JP1.6 U3.6 | length 14.3
  Top Layer w0.254: U3.6@42.262,-4.242 42.262,-1.68 46.965,3.023 46.965,6.374 JP1.6@45.719,7.62
A124: JP1.33 U3.7 | length 11
  Top Layer w0.254: U3.7@41.612,-4.242 41.612,-1.509 45.72,2.599 JP1.33@45.72,5.08
A126: JP1.7 U3.8 | length 13.8
  Top Layer w0.254: U3.8@40.962,-4.242 40.962,-1.029 43.739,1.747 43.739,1.753 44.399,2.413 44.399,6.399 JP1.7@43.179,7.62
A127: JP1.32 U3.9 | length 10.5
  Top Layer w0.254: U3.9@40.312,-4.242 40.312,-0.889 43.18,1.979 JP1.32@43.18,5.08
A131: JP1.8
A132: JP1.31 R11.1 U12.6 | length 33.3
  Top Layer w0.254: v1(37.211,-8.407) 37.211,-18.504 37.478,-18.771 U12.6@39.649,-18.771 ; v1(37.211,-5.309) 37.211,1.601 37.186,1.627 JP1.31@40.639,5.08
  Bottom Layer w0.254: v1@37.211,-8.387 v1(37.211,-8.407) v1(37.211,-5.309) 38.837,-5.309 39.573,-6.045 R11.1@42.621,-6.045
A133: JP1.9
A134: JP1.30 R12.1 U12.5 | length 41
  Top Layer w0.254: v1(36.322,-8.407) 36.322,-19.304 37.059,-20.041 U12.5@39.649,-20.041 ; v1(36.322,-5.309) 36.322,3.303 JP1.30@38.099,5.08
  Bottom Layer w0.254: v1(36.322,-8.407) v1(36.322,-5.309) 37.033,-4.597 43.561,-4.597 45.009,-6.045 R12.1@47.688,-6.045
A137: JP1.10
A138: JP1.29 U12.2 | length 25.2
  Top Layer w0.254: U12.2@32.233,-17.501 32.245,-17.489 34.378,-17.489 35.535,-16.332 v1(35.535,-8.407) ; v1(35.535,-5.309) 35.535,5.056 JP1.29@35.559,5.08
  Bottom Layer w0.254: v1(35.535,-8.407) v1(35.535,-5.309)
A140: JP1.28 U2.1 | length 10
  Top Layer w0.254: U2.1@31.458,-4.242 31.458,0.266 33.02,1.829 JP1.28@33.019,5.08
A141: JP1.12 U2.3 | length 13
  Top Layer w0.254: U2.3@30.158,-4.242 30.158,-0.01 31.648,1.48 31.648,6.452 JP1.12@30.48,7.62
A142: JP1.27 U2.4 | length 9.7
  Top Layer w0.254: U2.4@29.508,-4.242 29.508,0.425 30.48,1.397 JP1.27@30.479,5.08
A143: JP1.13 U2.5 | length 12.4
  Top Layer w0.254: JP1.13@27.94,7.62 29.108,6.452 29.108,1.117 28.858,0.867 U2.5@28.858,-4.242
B1: C3.18 U2.15 | length 55.2
  Top Layer w0.254: U2.15@28.208,-9.982 28.214,-9.988 28.214,-13.028 v1(28.221,-13.035) ; v1@28.214,-13.054 v1@28.221,-13.06
  Bottom Layer w0.254: C3.18@27.178,-64.77 27.178,-60.731 28.221,-59.689 v1(28.221,-13.035)
B2: C4.18 U2.14 | length 59.2
  Top Layer w0.254: U2.14@27.558,-9.982 27.564,-9.988 27.564,-13.028 v1(27.571,-13.035) ; v1@27.564,-13.054 v1@27.571,-13.06
  Bottom Layer w0.254: C4.18@27.178,-67.818 27.178,-67.513 26.873,-67.513 25.984,-66.624 25.984,-60.884 27.571,-59.297 v1(27.571,-13.035)
B5: C3.17 U2.13 | length 55.7
  Top Layer w0.254: U2.13@26.908,-9.982 26.914,-9.988 26.914,-13.028 v1(26.921,-13.035) ; v1@26.914,-13.054 v1@26.921,-13.06
  Bottom Layer w0.254: C3.17@24.638,-64.77 24.638,-61.239 26.921,-58.957 v1(26.921,-13.035)
B6: C4.17 U2.12 | length 59.5
  Top Layer w0.254: U2.12@26.258,-9.982 26.264,-9.988 26.264,-13.028 v1(26.271,-13.035) ; v1@26.264,-13.054 v1@26.271,-13.06
  Bottom Layer w0.254: C4.17@24.638,-67.818 23.444,-66.624 23.444,-61.392 26.271,-58.565 v1(26.271,-13.035)
B7: C3.16 U1.20 | length 56.7
  Top Layer w0.254: v1(17.403,-13.035) U1.20@17.403,-9.982
  Bottom Layer w0.254: v1(17.403,-13.035) 17.418,-13.049 17.418,-13.103 17.424,-13.11 17.424,-58.115 22.098,-62.789 C3.16@22.098,-64.77
B8: C4.16 U1.18 | length 60.3
  Top Layer w0.254: v1(16.103,-13.035) U1.18@16.103,-9.982
  Bottom Layer w0.254: v1(16.103,-13.035) 16.103,-57.657 20.777,-62.332 20.777,-66.497 C4.16@22.098,-67.818
B9: C3.15 U1.17 | length 56.5
  Top Layer w0.254: v1(15.453,-13.035) U1.17@15.453,-9.982
  Bottom Layer w0.254: v1(15.453,-13.035) 15.453,-57.922 19.558,-62.027 C3.15@19.558,-64.77
B10: C4.15 U1.16 | length 59.8
  Top Layer w0.254: v1(14.803,-13.035) U1.16@14.803,-9.982
  Bottom Layer w0.254: v1(14.803,-13.035) 14.803,-58.11 18.288,-61.595 18.288,-66.548 C4.15@19.558,-67.818
B11: C3.14 U1.15 | length 56
  Top Layer w0.254: v1(14.153,-13.035) U1.15@14.153,-9.982
  Bottom Layer w0.254: v1(14.153,-13.035) 14.153,-58.273 17.018,-61.138 C3.14@17.018,-64.77
B12: C4.14 U1.14 | length 59.3
  Top Layer w0.254: U1.14@13.503,-9.982 13.511,-9.99 13.511,-13.022 v1(13.519,-13.03)
  Bottom Layer w0.254: v1(13.519,-13.03) 13.513,-13.036 13.513,-58.481 15.748,-60.717 15.748,-66.548 C4.14@17.018,-67.818
B14: C3.13 U1.13 | length 55.5
  Top Layer w0.254: U1.13@12.853,-9.982 12.853,-12.973 12.9,-13.02 v1(12.9,-13.034)
  Bottom Layer w0.254: v1(12.9,-13.034) 12.9,-58.659 14.478,-60.237 C3.13@14.478,-64.77
B15: C4.13 U1.12 | length 58.8
  Top Layer w0.254: v1(12.203,-13.089) U1.12@12.203,-9.982
  Bottom Layer w0.254: v1(12.203,-13.089) 12.203,-58.752 13.144,-59.694 13.144,-66.484 C4.13@14.478,-67.818
B16: C3.12 U5.20 | length 67.3
  Top Layer w0.254: C3.12@11.938,-64.77 11.938,-59.585 17.904,-53.619 23.927,-53.619 31.166,-46.38 31.166,-26.111 21.179,-16.125 U5.20@18.11,-16.125
B17: C4.12 U5.18 | length 70.2
  Top Layer w0.254: C4.12@11.938,-67.818 11.938,-67.513 11.633,-67.513 10.757,-66.637 10.757,-60.048 17.693,-53.111 23.716,-53.111 30.658,-46.17 30.658,-26.322 21.761,-17.425 U5.18@18.11,-17.425
B21: C3.11 U5.17 | length 65.9
  Top Layer w0.254: C3.11@9.398,-64.77 9.398,-60.688 17.483,-52.603 23.506,-52.603 30.15,-45.96 30.15,-26.532 21.692,-18.075 U5.17@18.11,-18.075
B22: C4.11 U5.16 | length 68.8
  Top Layer w0.254: C4.11@9.398,-67.818 9.398,-67.462 8.217,-66.281 8.217,-64.598 8.23,-64.585 8.23,-61.138 17.272,-52.095 23.296,-52.095 29.642,-45.749 29.642,-26.743 21.624,-18.725 U5.16@18.11,-18.725
B23: C3.10 U5.15 | length 66
  Top Layer w0.254: C3.10@6.858,-64.77 6.858,-59.675 8.075,-58.458 10.191,-58.458 17.087,-51.562 23.111,-51.562 29.134,-45.539 29.134,-26.953 21.556,-19.375 U5.15@18.11,-19.375
B24: C4.10 U5.14 | length 69
  Top Layer w0.254: C4.10@6.858,-67.818 6.858,-67.615 6.655,-67.615 5.677,-66.637 5.677,-60.138 7.865,-57.95 9.981,-57.95 16.877,-51.054 22.9,-51.054 28.626,-45.328 28.626,-27.164 21.487,-20.025 U5.14@18.11,-20.025
B26: C3.9 U5.13 | length 64.8
  Top Layer w0.254: C3.9@4.318,-64.77 4.318,-60.778 7.654,-57.442 9.77,-57.442 16.666,-50.546 22.69,-50.546 28.118,-45.118 28.118,-27.374 21.419,-20.675 U5.13@18.11,-20.675
B27: C4.9 U5.12 | length 67.7
  Top Layer w0.254: C4.9@4.318,-67.818 3.124,-66.624 3.124,-61.254 7.444,-56.934 9.56,-56.934 16.456,-50.038 22.479,-50.038 27.61,-44.907 27.61,-27.584 21.35,-21.325 U5.12@18.11,-21.325
B29: C3.8 U7.20 | length 60.5
  Top Layer w0.254: C3.8@1.778,-64.77 1.778,-61.882 7.234,-56.426 9.35,-56.426 16.246,-49.53 22.269,-49.53 27.102,-44.697 27.102,-30.502 22.231,-25.632 U7.20@18.11,-25.632
B30: C4.8 U7.18 | length 63.3
  Top Layer w0.254: C4.8@1.778,-67.818 0.508,-66.548 0.508,-62.433 7.023,-55.918 9.139,-55.918 16.035,-49.022 22.058,-49.022 26.594,-44.487 26.594,-30.712 22.813,-26.932 U7.18@18.11,-26.932
B32: C3.7 U7.17 | length 62.7
  Top Layer w0.254: C3.7@-0.762,-64.77 -0.762,-56.761 0.589,-55.41 8.929,-55.41 15.825,-48.514 21.848,-48.514 26.086,-44.276 26.086,-30.923 22.745,-27.582 U7.17@18.11,-27.582